# EAGLE board PowerMeterShield (EAGLE 6.4)
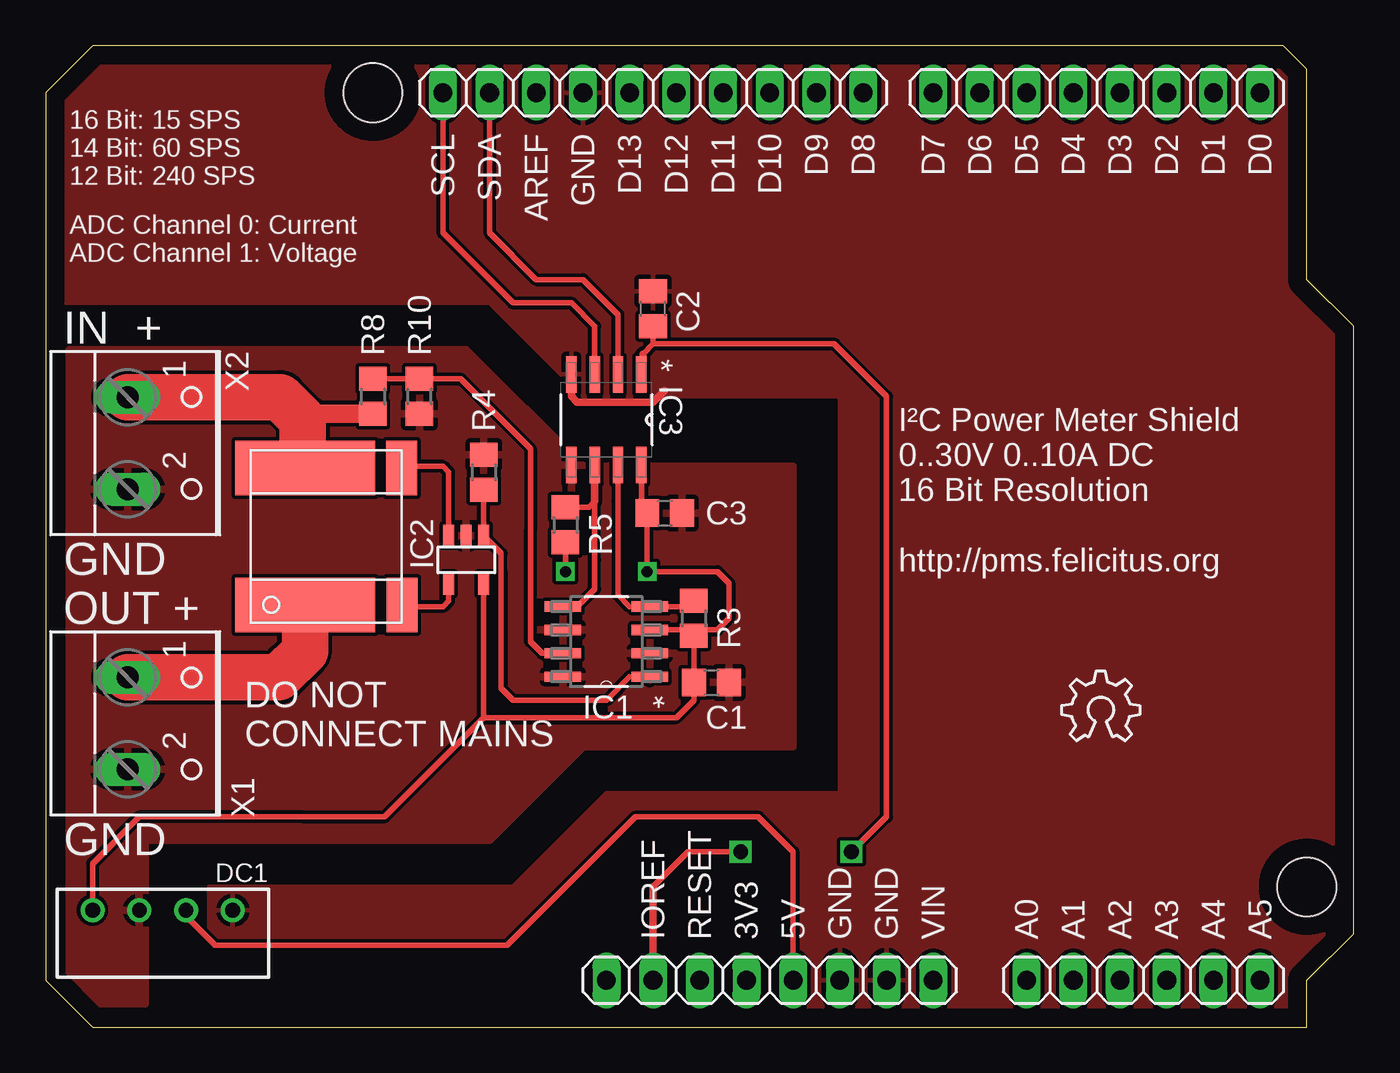
[diagram p0: board, top side]
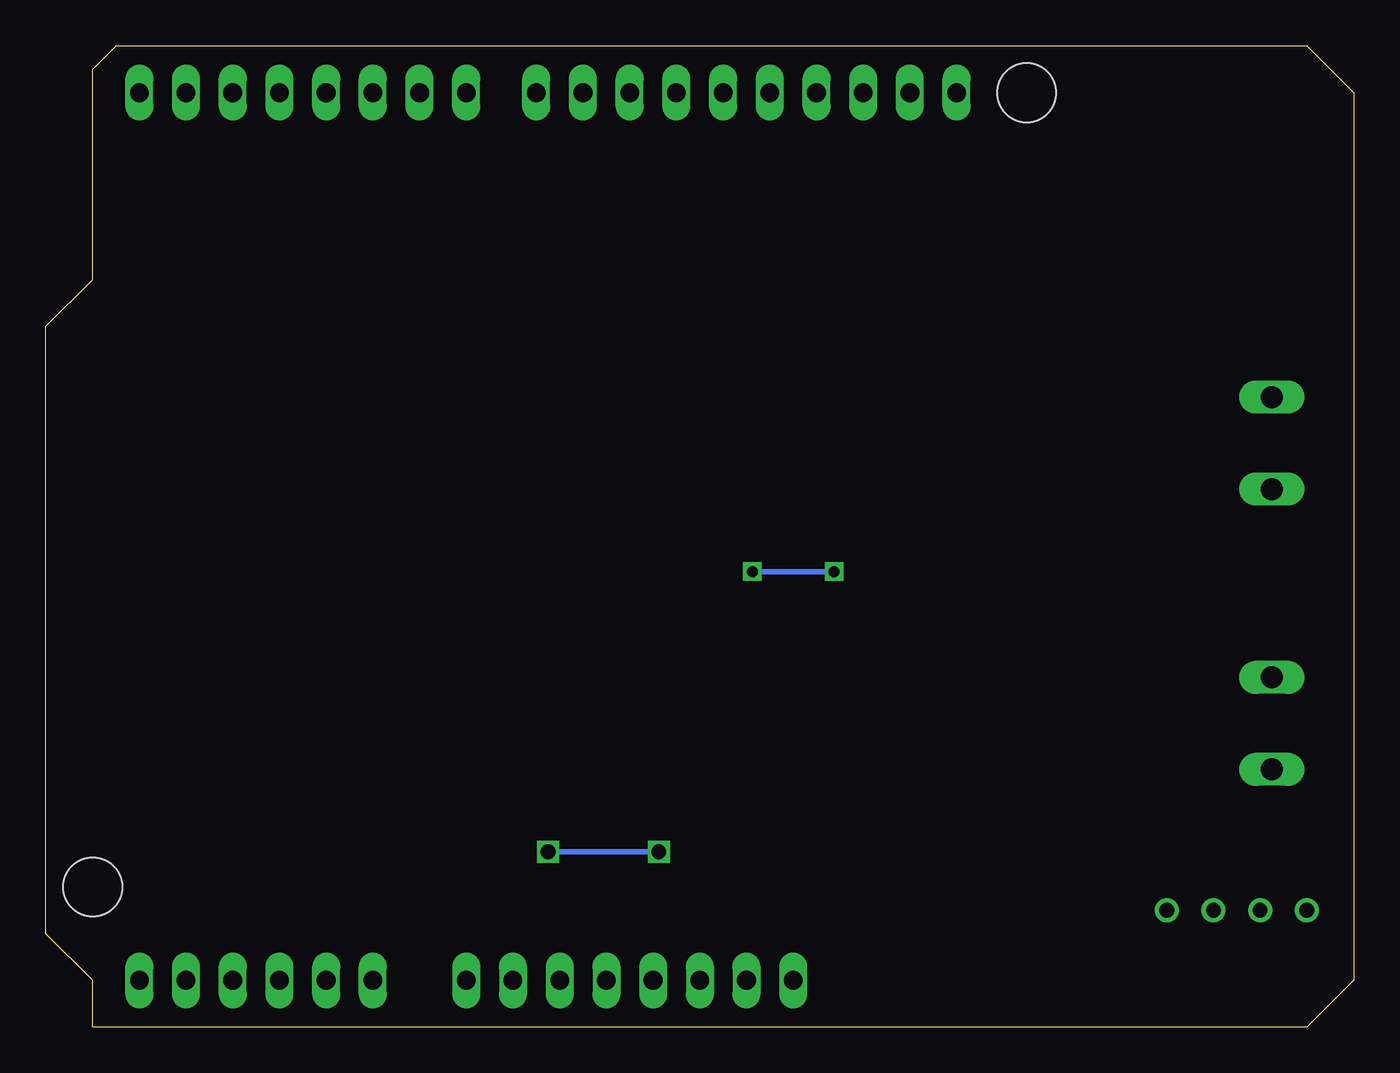
[diagram p1: board, bottom side, seen from below]

Size 71.12 x 53.34 mm. Coordinates in mm from the lower left corner, seen from the top.
Outline: 2.54,0 68.58,0 68.58,2.54 71.12,5.08 71.12,38.1 68.58,40.64 68.58,52.07 67.31,53.34 2.54,53.34 0,50.8 0,2.54 2.54,0
Copper layers (1*16): Top 0.035mm / dielectric 1.5mm / Bottom 0.035mm
Design rules "default *": minimum track width 10mil, minimum drill 0.6mm, track to track 8mil, track to pad 8mil, pad to pad 8mil, via to via 8mil, smd to smd 8mil, copper to edge 40mil, drill to drill 8mil, minimum pad ring 10mil, minimum via ring 8mil, stop-mask expansion 4mil, vias tented up to drill 0mil, thermal gap 10mil
Net classes: 1 highpower: width 0.305 mm; 2 isolated: clearance 20 mm
Holes 3.2 mm at 17.78,50.8 68.58,7.62

## Footprints (pad centres in the part's own frame; a part is rotated, then mirrored left to right if it is on the bottom)
C0805 = smd 1.3 x 1.5: 1 -0.95,0; 2 0.95,0
4SIL = drill 0.8: 1 -3.81,0; 2 -1.27,0; 3 1.27,0; 4 3.81,0
SOIC127P600X175-8N = smd 1.981 x 0.559: 1 -2.362,1.905; 2 -2.362,0.635; 3 -2.362,-0.635; 4 -2.362,-1.905; 5 2.362,-1.905; 6 2.362,-0.635; 7 2.362,0.635; 8 2.362,1.905
SOT23-5 = smd 0.6 x 1.2: 1 -0.95,-1.306; 2 0,-1.306; 3 0.95,-1.306; 4 0.95,1.306; 5 -0.95,1.306
SOIC127P600X175-8N' = smd 1.981 x 0.559: 1 -2.464,1.905; 2 -2.464,0.635; 3 -2.464,-0.635; 4 -2.464,-1.905; 5 2.464,-1.905; 6 2.464,-0.635; 7 2.464,0.635; 8 2.464,1.905
1X10 = drill 1.016 long: 1 -11.43,0; 2 -8.89,0; 3 -6.35,0; 4 -3.81,0; 5 -1.27,0; 6 1.27,0; 7 3.81,0; 8 6.35,0; 9 8.89,0; 10 11.43,0
1X08 = drill 1.016 long: 1 -8.89,0; 2 -6.35,0; 3 -3.81,0; 4 -1.27,0; 5 1.27,0; 6 3.81,0; 7 6.35,0; 8 8.89,0
1X06 = drill 1.016 long: 1 -6.35,0; 2 -3.81,0; 3 -1.27,0; 4 1.27,0; 5 3.81,0; 6 6.35,0
R0805 = smd 1.3 x 1.5: 1 -0.95,0; 2 0.95,0
CSM3637M = smd 7.62 x 2.95: I1 -1.15,3.725; I2 -1.15,-3.725 | smd 1.68 x 2.95: S1 4.1,3.725; S2 4.125,-3.725
W237-102 = drill 1.194 long: 1 -2.5,-1.27; 2 2.5,-1.27

## Placement (x,y rotation side)
C1  100n  [C0805]  36.2,18.73 0 top
C2  100n  [C0805]  33.02,39.05 90 top
C3  100n  [C0805]  33.66,27.94 0 top
DC1  VA-0505S  [4SIL]  6.35,6.35 180 top
IC1  MCP3426A0-E/SN  [SOIC127P600X175-8N]  30.48,20.95 180 top
IC2  INA138  [SOT23-5]  22.86,25.4 180 top
IC3  ADUM1250ARZ  [SOIC127P600X175-8N']  30.48,33.02 270 top
JP1  [1X10]  33.02,50.8 0 top
JP2  [1X08]  57.15,50.8 0 top
JP3  [1X08]  39.37,2.54 180 top
JP4  [1X06]  59.69,2.54 0 top
R3  4.7k  [R0805]  35.24,22.23 270 top
R4  200k  [R0805]  23.81,30.16 270 top
R5  4.7k  [R0805]  28.26,27.3 270 top
R8  1M  [R0805]  17.78,34.29 270 top
R10  68k  [R0805]  20.32,34.29 90 top
RS1  0.005  [CSM3637M]  15.24,26.67 0 top
U$1  [OSHW_6X150_NOTEXT]  55.24,15.56 0 top
X1  [W237-102]  5.71,16.51 270 top
X2  [W237-102]  5.71,31.75 270 top

## Library data of the parts
C1-C3 = rcl; OC_FARNELL: 2310707; PRICE_100: 0.005
DC1 = dc-dc-converter; OC_FARNELL: 2079696; OC_NEWARK: unknown; OC_REICHELT: SIM1-0505S DIL8; PRICE_100: 2,89
IC1 = MCP3428; MPN: MCP3426A0-E/SN; OC_FARNELL: 1825012; OC_NEWARK: 52R9954; PACKAGE: SOIC-8; PRICE_10: 2.06; SUPPLIER: Microchip
IC2 = burr-brown; MF: TEXAS INSTRUMENTS; MPN: INA138NA/250; OC_DIGIKEY: INA168NADKR-ND; OC_FARNELL: 1206900RL; OC_NEWARK: 80K5906; PRICE_10: 1.21
IC3 = Adum1250; MPN: ADUM1250ARZ; OC_FARNELL: 1814353; OC_NEWARK: 27M9880; OC_TME: ADUM1250ARZ; PACKAGE: SOIC-8; PRICE_100: 3.78; PRICE_100_TME: 1.76; SUPPLIER: Analog Devices
JP1-JP4 = pinhead
R3 R5 = rcl; OC_FARNELL: 2129167; PRICE_100: 0.001
R4 = rcl; OC_FARNELL: 2129299; PRICE_100: 0.001
R8 = rcl; OC_FARNELL: 2129354; PRICE_100: 0.001
R10 = rcl; OC_FARNELL: 2129265; PRICE_100: 0.001
RS1 = R-Vishay; OC_FARNELL: 1107419RL; PRICE_10: 0.844
U$1 = ohw-logo
X1 X2 = con-wago-500; MPN: 237-102; OC_FARNELL: 1717001; OC_NEWARK: 70K9898; PRICE_10: 0.294

## Nets
+5V: DC1.2 JP3.4
+5V/2: C1.1 C3.1 DC1.4 IC1.3 IC2.5 IC3.8 R3.2 R5.2
ADC1: IC1.1 IC2.1 R4.2
ADC2: IC1.7 R8.1 R10.2
GND: C2.2 DC1.1 IC3.4 JP1.4 JP3.2 JP3.3
GNDI: C1.2 C3.2 DC1.3 IC1.2 IC1.6 IC1.8 IC2.2 IC3.5 R4.1 R10.1 X1.2 X2.2
IOREF: C2.1 IC3.1 JP3.7
N$1: IC2.3 RS1.S1
N$2: IC2.4 RS1.S2
N$5 [highpower]: RS1.I2 X1.1
SCL: IC3.3 JP1.1
SCLI: IC1.5 IC3.6 R5.1
SDA: IC3.2 JP1.2
SDAI: IC1.4 IC3.7 R3.1
VIN_MEAS [highpower]: R8.2 RS1.I1 X2.1

## Tracks (layer width: path | path; a pad name or v marks a point on that pad's centre or on a via)
+5V
  Top 0.305: 7.62,6.03 9.21,4.45 25.08,4.45 32.07,11.43 38.73,11.43 40.64,9.53 JP3.4
  Top 0.406: DC1.2 7.62,6.03
+5V/2  (via drill 0.6)
  Top 0.254: 32.38,28.57 32.38,28.26 C3.1 | 35.56,21.59 R3.2 | IC2.5 | C1.1
  Top 0.305: DC1.4 2.54,8.89 5.08,11.43 13.97,11.43 18.41,11.43 23.81,16.83 | IC1.3 34.93,21.59 | R3.2 C1.1 | 32.38,29.84 32.38,28.57 | 35.56,21.59 36.51,21.59 37.15,22.23 37.15,24.13 36.51,24.77 v32.7,24.77 C3.1 | 23.81,16.83 IC2.5 | 23.81,16.83 34.29,16.83 35.24,17.78 C1.1 | 32.38,27.62 C3.1 | C3.1 | R5.2 v28.26,24.77 | C3.1
  Top 0.406: IC3.8 32.38,29.84 | 34.93,21.59 R3.2 | C1.1
  Bottom 0.305: v28.26,24.77 v32.7,24.77
ADC1
  Top 0.254: R4.2 | 31.75,19.05 IC1.1
  Top 0.305: R4.2 IC2.1 24.77,25.75 24.77,24.77 24.77,18.41 25.4,17.78 30.48,17.78 31.75,19.05
  Top 0.406: IC1.1 32.84,18.87
ADC2
  Top 0.254: 26.35,26.99 26.35,26.67
  Top 0.305: R8.1 R10.2 22.55,35.24 26.35,31.43 26.35,26.99 26.35,20.95 26.99,20.32 IC1.7
GND
  Top 0.406: 28.57,36.2 IC3.4 28.57,34.29 28.89,33.97 33.02,33.97 33.66,34.61
  pour Top: 24.13,39.37 0,39.37 0,50.8 2.54,53.34 67.31,53.34 68.58,52.07 68.58,40.64 71.12,38.1 71.12,5.08 68.58,2.54 68.58,0 8.89,0 8.89,7.62 25.4,7.62 30.48,12.7 43.18,12.7 43.18,34.29 29.21,34.29
GNDI
  pour Top: 1.27,2.54 1.27,36.83 22.86,36.83 29.21,30.48 40.64,30.48 40.64,15.24 29.21,15.24 24.13,10.16 5.4,10.16 5.4,1.27 2.54,1.27
IOREF  (via drill 0.8)
  Top 0.305: 32.46,36.59 33.02,37.15 | 33.02,37.15 38.1,37.15 42.86,37.15 45.72,34.29 45.72,11.43 v43.81,9.53 | 33.02,7.62 34.92,9.53 v37.78,9.53 | 33.02,37.15 C2.1
  Top 0.406: IC3.1 32.46,35.56 32.46,36.59 | JP3.7 33.02,7.62
  Bottom 0.305: v43.81,9.53 v37.78,9.53
N$1
  Top 0.254: 19.43,30.48 RS1.S1
  Top 0.305: IC2.3 21.91,30.16 21.59,30.48 19.43,30.48
N$2
  Top 0.254: 19.45,22.86 RS1.S2
  Top 0.305: IC2.4 21.91,23.18 21.59,22.86 19.45,22.86
N$5
  Top 2.54: RS1.I2 14.09,20.44 12.66,19.01 X1.1
SCL
  Top 0.305: IC3.3 29.84,38.1 28.57,39.37 25.4,39.37 21.59,43.18 JP1.1
SCLI
  Top 0.305: IC1.5 28.89,22.86 29.84,23.81 29.84,25.4 29.84,26.04 29.84,28.57 | 29.84,28.57 29.84,29.21 | R5.1 29.52,28.25 29.84,28.57
  Top 0.406: IC3.6 29.84,29.21 29.84,28.57
SDA
  Top 0.305: JP1.2 24.13,43.18 26.67,40.64 29.21,40.64 31.11,38.73 IC3.2
SDAI
  Top 0.254: 31.75,22.86 IC1.4
  Top 0.305: IC3.7 31.11,28.57 31.11,23.5 31.75,22.86 | IC1.4 34.93,22.86
  Top 0.406: 34.93,22.86 R3.1
VIN_MEAS
  Top 1.016: R8.2 14.29,33.34 13.97,33.02
  Top 2.54: X2.1 12.74,34.25 13.97,33.02 13.97,30.52 RS1.I1

## Text on the board
tPlace: I²C Power Meter Shield / 0..30V 0..10A DC / 16 Bit Resolution / / http://pms.felicitus.org
tNames: 16 Bit: 15 SPS / 14 Bit: 60 SPS / 12 Bit: 240 SPS | SCL | SDA | AREF | GND | D13 | D12 | D11 | D10 | D9 | D8 | D7 | D6 | D5 | D4 | D3 | D2 | D1 | D0 | ADC Channel 0: Current / ADC Channel 1: Voltage | IN + | GND | OUT + | DO NOT / CONNECT MAINS | GND | IOREF | RESET | 3V3 | 5V | GND | GND | VIN | A0 | A1 | A2 | A3 | A4 | A5